# EAGLE board PGTN_daisy1_controls2 (EAGLE 9.6.0)
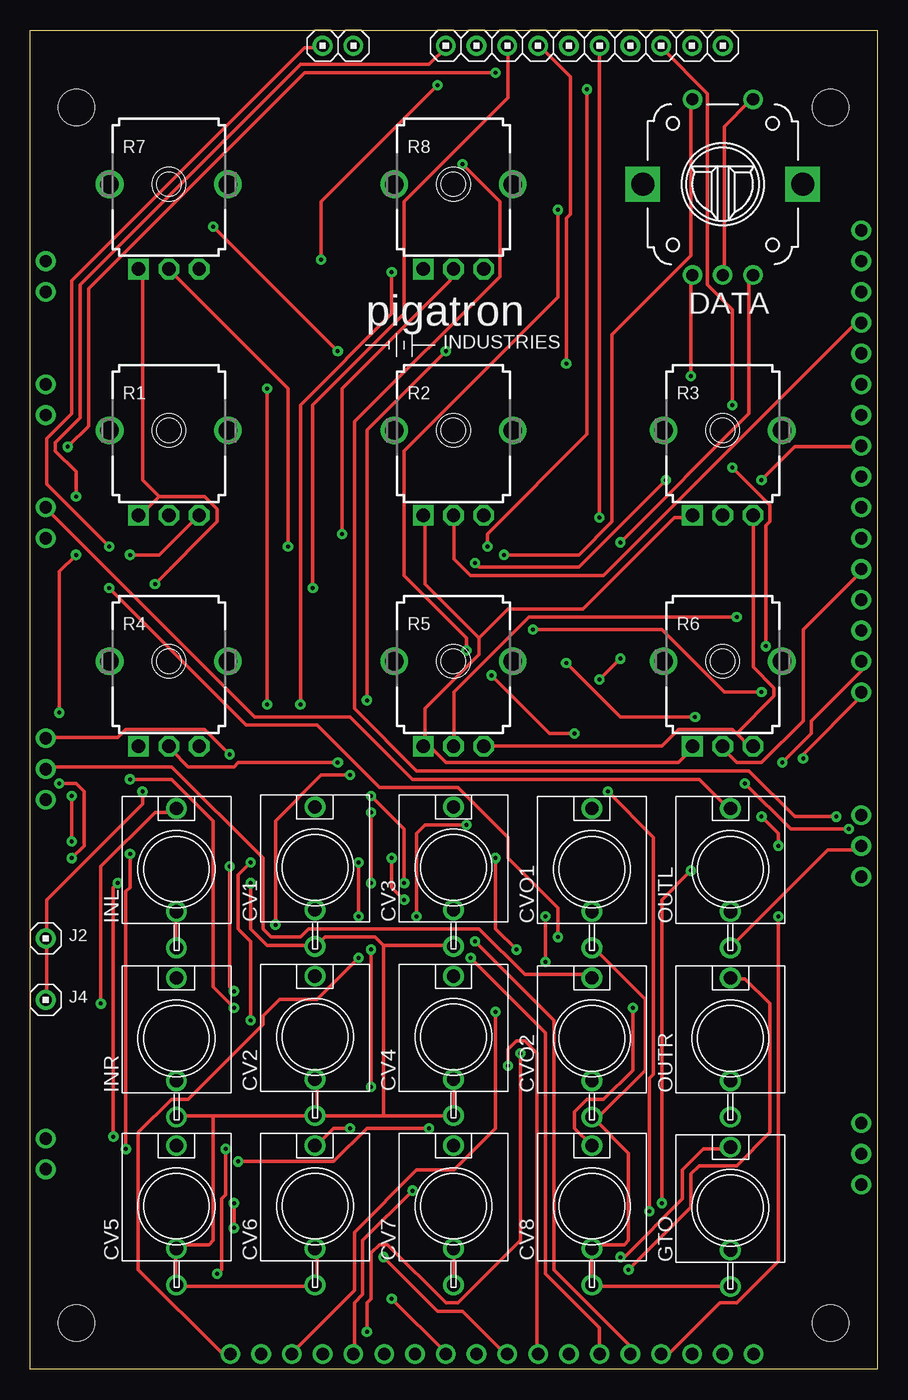
[diagram p0: board, top side]
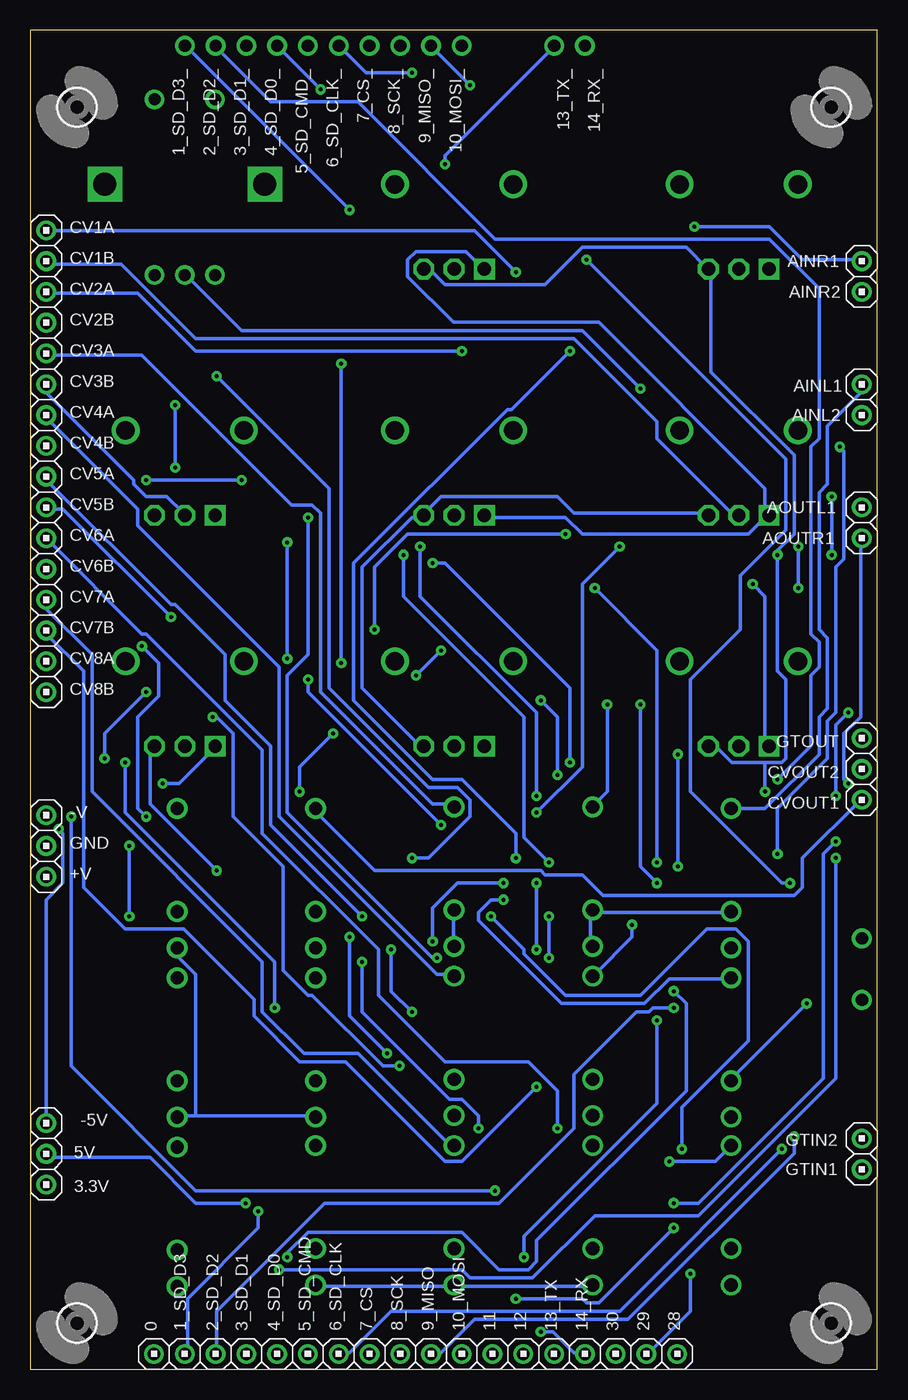
[diagram p1: board, bottom side, seen from below]

Size 69.9 x 110.48 mm. Coordinates in mm from the lower left corner, seen from the top.
Outline: 0,110.48 69.9,110.48 69.9,0 0,0 0,110.48
Copper layers (1*16): Top 0.0356mm / dielectric 1.5011mm / Bottom 0.0356mm
Design rules "pigatron": minimum track width 12mil, minimum drill 13mil, track to track 15mil, track to pad 10mil, pad to pad 10mil, via to via 10mil, smd to smd 6mil, copper to edge 15mil, drill to drill 10mil, minimum pad ring 12mil, minimum via ring 10mil, stop-mask expansion 4mil, vias tented up to drill 0mil, thermal gap 10mil

## Footprints (pad centres in the part's own frame; a part is rotated, then mirrored left to right if it is on the bottom)
HEADER/MALE/01 = drill 1.016: 1 0,0
WQP-PJ301M-12_JACK = drill 1.1: P$1 0,5; P$2 0,-3.5; P$3 0,-6.5
PEC12_INCREMENTAL_ENCODER = drill 1: A -2.5,-7.5; B 2.5,-7.5; C 0,-7.5; P1 -2.5,7; P2 2.5,7 | drill 1.9 square: GND@1 -6.6,0; GND@2 6.6,0
9MM_SNAP-IN_POT = drill 1.1 square: 1 -2.5,-7 | drill 1.1 octagon: 2 0,-7; 3 2.5,-7 | drill 1.524 pad 2.286: CHASSIS1 -4.881,0; CHASSIS2 4.881,0
STANDOFF/3.0 = hole 3: 0,0

## Placement (x,y rotation side)
0  HEADER/MALE/01  [HEADER/MALE/01]  59.69,1.26 90 bottom
1_SD_D3  HEADER/MALE/01  [HEADER/MALE/01]  57.15,1.26 90 bottom
1_SD_D3_  HEADER/MALE/01  [HEADER/MALE/01]  57.15,109.21 270 top
2_SD_D2  HEADER/MALE/01  [HEADER/MALE/01]  54.61,1.26 90 bottom
2_SD_D2_  HEADER/MALE/01  [HEADER/MALE/01]  54.61,109.21 270 top
3.3V  HEADER/MALE/01  [HEADER/MALE/01]  68.58,15.23 270 bottom
3_SD_D1  HEADER/MALE/01  [HEADER/MALE/01]  52.07,1.26 90 bottom
3_SD_D1_  HEADER/MALE/01  [HEADER/MALE/01]  52.07,109.21 270 top
4_SD_D0  HEADER/MALE/01  [HEADER/MALE/01]  49.53,1.26 90 bottom
4_SD_D0_  HEADER/MALE/01  [HEADER/MALE/01]  49.53,109.21 270 top
5_SD_CMD  HEADER/MALE/01  [HEADER/MALE/01]  46.99,1.26 90 bottom
5_SD_CMD_  HEADER/MALE/01  [HEADER/MALE/01]  46.99,109.21 270 top
5V  HEADER/MALE/01  [HEADER/MALE/01]  68.58,17.77 180 bottom
6_SD_CLK  HEADER/MALE/01  [HEADER/MALE/01]  44.45,1.26 90 bottom
6_SD_CLK_  HEADER/MALE/01  [HEADER/MALE/01]  44.45,109.21 270 top
7_CS  HEADER/MALE/01  [HEADER/MALE/01]  41.91,1.26 90 bottom
7_CS_  HEADER/MALE/01  [HEADER/MALE/01]  41.91,109.21 270 top
8_SCK  HEADER/MALE/01  [HEADER/MALE/01]  39.37,1.26 90 bottom
8_SCK_  HEADER/MALE/01  [HEADER/MALE/01]  39.37,109.21 270 top
9_MISO  HEADER/MALE/01  [HEADER/MALE/01]  36.83,1.26 90 bottom
9_MISO_  HEADER/MALE/01  [HEADER/MALE/01]  36.83,109.21 270 top
10_MOSI  HEADER/MALE/01  [HEADER/MALE/01]  34.29,1.26 90 bottom
10_MOSI_  HEADER/MALE/01  [HEADER/MALE/01]  34.29,109.21 270 top
11  HEADER/MALE/01  [HEADER/MALE/01]  31.75,1.26 90 bottom
12  HEADER/MALE/01  [HEADER/MALE/01]  29.21,1.26 90 bottom
13_TX  HEADER/MALE/01  [HEADER/MALE/01]  26.67,1.26 90 bottom
13_TX_  HEADER/MALE/01  [HEADER/MALE/01]  26.67,109.21 270 top
14_RX  HEADER/MALE/01  [HEADER/MALE/01]  24.13,1.26 90 bottom
14_RX_  HEADER/MALE/01  [HEADER/MALE/01]  24.13,109.21 270 top
28  HEADER/MALE/01  [HEADER/MALE/01]  16.51,1.26 90 bottom
29  HEADER/MALE/01  [HEADER/MALE/01]  19.05,1.26 90 bottom
30  HEADER/MALE/01  [HEADER/MALE/01]  21.59,1.26 90 bottom
+V  HEADER/MALE/01  [HEADER/MALE/01]  68.58,40.63 0 bottom
-5V  HEADER/MALE/01  [HEADER/MALE/01]  68.58,20.31 0 bottom
-V  HEADER/MALE/01  [HEADER/MALE/01]  68.58,45.71 0 bottom
AINL1  HEADER/MALE/01  [HEADER/MALE/01]  1.27,81.27 180 bottom
AINL2  HEADER/MALE/01  [HEADER/MALE/01]  1.27,78.73 180 bottom
AINR1  HEADER/MALE/01  [HEADER/MALE/01]  1.27,91.43 180 bottom
AINR2  HEADER/MALE/01  [HEADER/MALE/01]  1.27,88.89 180 bottom
AOUTL1  HEADER/MALE/01  [HEADER/MALE/01]  1.27,71.11 180 bottom
AOUTR1  HEADER/MALE/01  [HEADER/MALE/01]  1.27,68.57 180 bottom
CV1  WQP-PJ301M-12_JACK  [WQP-PJ301M-12_JACK]  23.5,41.39 0 top
CV1A  HEADER/MALE/01  [HEADER/MALE/01]  68.58,93.97 0 bottom
CV1B  HEADER/MALE/01  [HEADER/MALE/01]  68.58,91.43 0 bottom
CV2  WQP-PJ301M-12_JACK  [WQP-PJ301M-12_JACK]  23.5,27.42 0 top
CV2A  HEADER/MALE/01  [HEADER/MALE/01]  68.58,88.89 0 bottom
CV2B  HEADER/MALE/01  [HEADER/MALE/01]  68.58,86.35 0 bottom
CV3  WQP-PJ301M-12_JACK  [WQP-PJ301M-12_JACK]  34.92,41.39 0 top
CV3A  HEADER/MALE/01  [HEADER/MALE/01]  68.58,83.81 0 bottom
CV3B  HEADER/MALE/01  [HEADER/MALE/01]  68.58,81.27 0 bottom
CV4  WQP-PJ301M-12_JACK  [WQP-PJ301M-12_JACK]  34.92,27.42 0 top
CV4A  HEADER/MALE/01  [HEADER/MALE/01]  68.58,78.73 0 bottom
CV4B  HEADER/MALE/01  [HEADER/MALE/01]  68.58,76.19 0 bottom
CV5  WQP-PJ301M-12_JACK  [WQP-PJ301M-12_JACK]  12.06,13.45 0 top
CV5A  HEADER/MALE/01  [HEADER/MALE/01]  68.58,73.65 0 bottom
CV5B  HEADER/MALE/01  [HEADER/MALE/01]  68.58,71.11 0 bottom
CV6  WQP-PJ301M-12_JACK  [WQP-PJ301M-12_JACK]  23.5,13.45 0 top
CV6A  HEADER/MALE/01  [HEADER/MALE/01]  68.58,68.57 0 bottom
CV6B  HEADER/MALE/01  [HEADER/MALE/01]  68.58,66.03 0 bottom
CV7  WQP-PJ301M-12_JACK  [WQP-PJ301M-12_JACK]  34.92,13.45 0 top
CV7A  HEADER/MALE/01  [HEADER/MALE/01]  68.58,63.49 0 bottom
CV7B  HEADER/MALE/01  [HEADER/MALE/01]  68.58,60.95 0 bottom
CV8  WQP-PJ301M-12_JACK  [WQP-PJ301M-12_JACK]  46.35,13.45 0 top
CV8A  HEADER/MALE/01  [HEADER/MALE/01]  68.58,58.41 0 bottom
CV8B  HEADER/MALE/01  [HEADER/MALE/01]  68.58,55.87 0 bottom
CVO1  WQP-PJ301M-12_JACK  [WQP-PJ301M-12_JACK]  46.35,41.27 0 top
CVO2  WQP-PJ301M-12_JACK  [WQP-PJ301M-12_JACK]  46.35,27.29 0 top
CVOUT1  HEADER/MALE/01  [HEADER/MALE/01]  1.27,46.98 180 bottom
CVOUT2  HEADER/MALE/01  [HEADER/MALE/01]  1.27,49.52 180 bottom
DATA  ENCODER_SW1-PEC12  [PEC12_INCREMENTAL_ENCODER]  57.15,97.78 0 top
GND  HEADER/MALE/01  [HEADER/MALE/01]  68.58,43.17 0 bottom
GTIN1  HEADER/MALE/01  [HEADER/MALE/01]  1.27,16.5 180 bottom
GTIN2  HEADER/MALE/01  [HEADER/MALE/01]  1.27,19.04 180 bottom
GTO  WQP-PJ301M-12_JACK  [WQP-PJ301M-12_JACK]  57.78,13.33 0 top
GTOUT  HEADER/MALE/01  [HEADER/MALE/01]  1.27,52.06 180 bottom
INL  WQP-PJ301M-12_JACK  [WQP-PJ301M-12_JACK]  12.06,41.27 0 top
INR  WQP-PJ301M-12_JACK  [WQP-PJ301M-12_JACK]  12.06,27.29 0 top
J2  HEADER/MALE/01  [HEADER/MALE/01]  1.27,35.55 0 top
J4  HEADER/MALE/01  [HEADER/MALE/01]  1.27,30.47 0 top
OUTL  WQP-PJ301M-12_JACK  [WQP-PJ301M-12_JACK]  57.78,41.27 0 top
OUTR  WQP-PJ301M-12_JACK  [WQP-PJ301M-12_JACK]  57.78,27.29 0 top
R1  [9MM_SNAP-IN_POT]  11.43,77.46 0 top
R2  [9MM_SNAP-IN_POT]  34.92,77.46 0 top
R3  [9MM_SNAP-IN_POT]  57.15,77.46 0 top
R4  [9MM_SNAP-IN_POT]  11.43,58.41 0 top
R5  [9MM_SNAP-IN_POT]  34.92,58.41 0 top
R6  [9MM_SNAP-IN_POT]  57.15,58.41 0 top
R7  [9MM_SNAP-IN_POT]  11.43,97.78 0 top
R8  [9MM_SNAP-IN_POT]  34.92,97.78 0 top
U$1  [PIGATRON-LOGO]  36.58,86.1 0 top
U$2  [STANDOFF/3.0]  3.81,3.8 180 bottom
U$3  [STANDOFF/3.0]  66.04,3.8 180 bottom
U$4  [STANDOFF/3.0]  66.04,104.13 0 bottom
U$7  [STANDOFF/3.0]  3.81,104.13 0 bottom

## Library data of the parts
0 1_SD_D3 1_SD_D3_ 2_SD_D2 2_SD_D2_ 3.3V 3_SD_D1 3_SD_D1_ 4_SD_D0 4_SD_D0_ 5_SD_CMD 5_SD_CMD_ 5V 6_SD_CLK 6_SD_CLK_ 7_CS 7_CS_ 8_SCK 8_SCK_ 9_MISO 9_MISO_ 10_MOSI 10_MOSI_ 11 12 13_TX 13_TX_ 14_RX 14_RX_ 28-30 +V -5V -V AINL1 AINL2 AINR1 AINR2 AOUTL1 AOUTR1 CV1A CV1B CV2A CV2B CV3A CV3B CV4A CV4B CV5A CV5B CV6A CV6B CV7A CV7B CV8A CV8B CVOUT1 CVOUT2 GND GTIN1 GTIN2 GTOUT J2 J4 = connectors; SPICEPREFIX: X
CV1-CV8 CVO1 CVO2 DATA GTO INL INR OUTL OUTR R1-R8 = controls
U$1-U$4 U$7 = mechanical

## Nets
+12V: +V.1
-12V: -V.1
N$1: AOUTR1.1 OUTR.P$1
N$2: AINR1.1 INR.P$1
N$3: CV1.P$1 CV1A.1
N$4: AINL1.1 INL.P$1 INR.P$2
N$5: CV1B.1 R1.2
N$6: CV2.P$1 CV2A.1
N$7: CV3.P$1 CV3A.1
N$8: CV4.P$1 CV4A.1
N$9: CV5.P$1 CV5A.1
N$10: CV6.P$1 CV6A.1
N$11: CV7.P$1 CV7A.1
N$12: CV8.P$1 CV8A.1
N$13: CVO1.P$1 CVOUT1.1
N$14: CVO2.P$1 CVOUT2.1
N$15: CV3B.1 R3.2
N$16: CV4B.1 R4.2
N$17: CV5B.1 R5.2
N$18: CV6B.1 R6.2
N$19: CV7B.1 R7.2
N$20: CV8B.1 R8.2
N$21: GTO.P$1 GTOUT.1
N$22: CV2B.1 R2.2
N$23: -5V.1 R1.1 R2.1 R3.1 R4.1 R5.1 R6.1 R7.1 R8.1
N$25: 30.1 DATA.A
N$26: 29.1 DATA.B
N$27: 28.1 DATA.P1
N$28: 7_CS.1 7_CS_.1
N$29: 8_SCK.1 8_SCK_.1
N$30: 9_MISO.1 9_MISO_.1
N$31: 10_MOSI.1 10_MOSI_.1
N$34: 6_SD_CLK.1 6_SD_CLK_.1
N$35: 5_SD_CMD.1 5_SD_CMD_.1
N$36: 4_SD_D0.1 4_SD_D0_.1
N$37: 3_SD_D1.1 3_SD_D1_.1
N$38: 2_SD_D2.1 2_SD_D2_.1
N$39: 1_SD_D3.1 1_SD_D3_.1
N$40: 13_TX.1 13_TX_.1
N$41: 14_RX.1 14_RX_.1
N$42: AOUTL1.1 OUTL.P$1
N$44: 5V.1 J2.1 J4.1 R1.3 R2.3 R3.3 R4.3 R5.3 R6.3 R7.3 R8.3
PE: CV1.P$2 CV1.P$3 CV2.P$2 CV2.P$3 CV3.P$2 CV3.P$3 CV4.P$2 CV4.P$3 CV5.P$2 CV5.P$3 CV6.P$2 CV6.P$3 CV7.P$2 CV7.P$3 CV8.P$2 CV8.P$3 CVO1.P$3 CVO2.P$3 DATA.C DATA.P2 GND.1 GTO.P$3 INL.P$2 INL.P$3 INR.P$3 OUTL.P$3 OUTR.P$3

## Tracks (layer width: path | path; a pad name or v marks a point on that pad's centre or on a via)
N$1  (via drill 0.33)
  Top 0.305: v2.4,48.34 3.77,48.34 4.46,47.65 4.46,43.2 v3.43,42.17 | v49.38,8.22 54.52,13.36 54.52,16.11 55.21,16.79 58.29,16.79 61.04,19.54 61.04,30.16 58.98,32.22 57.95,32.22 OUTR.P$1
  Bottom 0.305: v2.4,48.34 2.74,48.68 2.74,52.45 1.37,53.83 1.37,68.57 AOUTR1.1 | v3.43,42.17 3.43,23.99 14.74,12.68 23.32,12.68 28.46,7.53 33.6,7.53 34.29,8.22 v49.38,8.22
N$2  (via drill 0.33)
  Top 0.305: v25.38,84 v15.09,94.29 | v29.83,42.17 29.83,39.77 v30.86,38.74
  Bottom 0.305: v15.09,94.29 8.91,94.29 6.17,91.54 1.37,91.54 AINR1.1 | v25.38,84 30.18,79.2 30.52,79.2 43.2,66.51 43.2,55.2 36.69,48.68 34.29,48.68 29.83,44.22 v29.83,42.17 | v30.86,38.74 31.89,38.74 32.92,37.71 32.92,37.02 26.06,30.16 19.2,30.16 17.14,32.22 12.34,32.22 INR.P$1
N$3  (via drill 0.33)
  Top 0.305: v29.83,90.52 29.83,87.09 22.29,79.54 v22.29,54.85
  Bottom 0.305: v29.83,90.52 33.26,93.94 68.58,93.94 CV1A.1 | v22.29,54.85 22.29,47.65 23.32,46.62 CV1.P$1
N$4  (via drill 0.33)
  Top 0.305: v5.83,30.16 5.83,41.48 10.29,45.94 12,45.94 INL.P$1
  Bottom 0.305: AINL1.1 1.37,81.26 1.37,80.57 4.12,77.83 4.12,73.03 4.8,72.34 4.8,61.03 4.12,60.34 4.12,54.51 4.8,53.83 4.8,50.74 9.26,46.28 12,46.28 INL.P$1 | v5.83,30.16 12,23.99 INR.P$2
N$5
  Bottom 0.305: CV1B.1 68.58,91.2 62.41,91.2 56.24,85.03 25.03,85.03 18.17,78.17 18.17,76.8 11.66,70.28 R1.2
N$6  (via drill 0.33)
  Top 0.305: v34.29,84 27.77,77.48 v27.77,55.2 | v26.4,49.02 24,49.02 20.23,45.25 v20.23,36.68
  Bottom 0.305: v34.29,84 56.24,84 61.04,88.8 68.58,88.8 CV2A.1 | v27.77,55.2 26.4,53.83 v26.4,49.02 | v20.23,36.68 20.23,35.65 23.32,32.57 CV2.P$1
N$7
  Bottom 0.305: CV3A.1 68.58,83.66 60.69,83.66 48.35,71.31 46.63,71.31 45.95,70.63 45.95,55.88 36.69,46.62 34.98,46.62 CV3.P$1
N$8
  Bottom 0.305: CV4A.1 68.58,78.51 61.04,70.97 61.04,69.6 49.38,57.94 49.38,45.6 36.35,32.57 34.98,32.57 CV4.P$1
N$9  (via drill 0.33)
  Top 0.305: v42.52,33.59 v42.52,37.37 | v32.92,19.88 27.77,19.88 25.03,17.13 v17.14,17.13
  Bottom 0.305: v42.52,37.37 50.06,44.91 50.06,51.43 53.84,55.2 53.84,58.97 57.95,63.08 58.29,63.08 68.58,73.37 CV5A.1 | v42.52,33.59 42.52,29.48 35.32,22.28 34.29,22.28 32.92,20.91 v32.92,19.88 | v17.14,17.13 13.37,17.13 12.34,18.16 CV5.P$1
N$10  (via drill 0.33)
  Top 0.305: v26.4,19.88 25.03,19.88 23.66,18.51 CV6.P$1
  Bottom 0.305: CV6A.1 60.69,60.68 60.35,60.68 50.75,51.08 50.75,44.22 41.15,34.62 41.15,30.85 35.66,25.36 28.8,25.36 26.4,22.96 v26.4,19.88
N$11
  Bottom 0.305: CV7A.1 68.58,62.74 64.81,58.97 64.81,47.65 50.75,33.59 50.75,29.48 47.32,26.05 42.86,26.05 34.98,18.16 CV7.P$1
N$12  (via drill 0.33)
  Top 0.305: CV8A.1 68.58,57.6 64.47,53.48 64.47,52.45 v62.06,50.05 | v49.72,29.82 49.72,24.68 47.32,22.28 45.95,22.28 44.92,21.25 44.92,19.88 46.29,18.51 CV8.P$1
  Bottom 0.305: v62.06,50.05 62.06,45.94 49.72,33.59 v49.72,29.82
N$13
  Bottom 0.305: CVOUT1.1 1.37,46.97 6.17,42.17 6.17,39.77 6.86,39.08 22.63,39.08 24.35,40.8 27.43,40.8 27.77,41.14 41.49,41.14 46.29,45.94 CVO1.P$1
N$14
  Top 0.305: CVOUT2.1 1.37,49.71 11.66,49.71 19.2,42.17 19.2,36.34 19.89,35.65 22.29,35.65 22.97,36.34 37.03,36.34 40.8,32.57 46.29,32.57 CVO2.P$1
N$15
  Bottom 0.305: CV3B.1 68.58,80.57 61.38,73.37 61.38,73.03 60.35,72 58.64,72 57.26,70.63 R3.2
N$16  (via drill 0.33)
  Top 0.305: v60.35,73.37 63.09,76.11 68.58,76.11 CV4B.1 | v52.46,73.37 45.26,66.17 37.03,66.17 v36.69,66.51 | v25.38,50.05 17.14,50.05 16.8,49.71 13.03,49.71 11.66,51.08 R4.2
  Bottom 0.305: v52.46,73.37 v60.35,73.37 | v36.69,66.51 35.66,66.51 25.38,56.23 v25.38,50.05
N$17  (via drill 0.33)
  Top 0.305: v58.29,62.05 41.15,62.05 34.98,55.88 34.98,51.43 R5.2
  Bottom 0.305: v58.29,62.05 67.21,70.97 68.58,70.97 CV5B.1
N$18
  Top 0.305: CV6B.1 68.58,65.83 63.78,61.03 63.78,53.48 60.35,50.05 58.29,50.05 57.26,51.08 R6.2
N$19  (via drill 0.33)
  Top 0.305: v28.12,34.62 v28.12,23.31 | v28.12,45.94 v28.12,40.11 | v21.26,67.88 21.26,80.91 11.66,90.52 R7.2
  Bottom 0.305: v28.12,23.31 34.29,17.13 35.66,17.13 43.89,25.36 47.66,25.36 51.44,29.14 51.44,30.51 57.26,36.34 62.06,36.34 65.49,39.77 65.49,57.6 68.58,60.68 CV7B.1 | v28.12,40.11 v28.12,34.62 | v28.12,45.94 24.35,49.71 24.35,64.8 v21.26,67.88
N$20  (via drill 0.33)
  Top 0.305: v63.78,50.4 63.78,50.74 68.58,55.54 CV8B.1 | v60.35,55.88 57.26,55.88 52.12,61.03 v41.49,61.03 | v25.72,68.91 25.72,80.91 34.63,89.83 34.63,90.52 R8.2
  Bottom 0.305: v63.78,50.4 63.78,52.45 v60.35,55.88 | v41.49,61.03 41.49,66.17 38.75,68.91 v25.72,68.91
N$21  (via drill 0.33)
  Top 0.305: v16.46,50.74 14.4,52.8 7.89,52.8 7.2,52.11 1.37,52.11 GTOUT.1 | v16.46,41.48 16.46,31.54 v16.8,31.19 | v48.69,9.25 49.03,9.25 53.84,14.05 53.84,16.45 55.55,18.16 57.61,18.16 GTO.P$1
  Bottom 0.305: v16.46,41.48 v16.46,50.74 | v16.8,31.19 15.77,30.16 15.77,22.96 28.12,10.62 28.12,8.9 28.8,8.22 31.2,8.22 34.29,11.31 46.98,11.31 48.69,9.59 v48.69,9.25
N$22
  Top 0.305: CV2B.1 68.58,86.06 67.89,86.06 47.32,65.48 36.35,65.48 34.98,66.85 34.98,70.28 R2.2
N$23  (via drill 0.33)
  Top 0.305: v10.29,64.8 15.43,69.94 15.43,70.97 14.4,72 10.63,72 | 10.63,72 9.26,70.63 R1.1 | 10.63,72 9.26,73.37 9.26,90.52 R7.1 | v67.55,44.57 62.75,44.57 v58.98,48.34 | R6.1 54.52,51.08 53.49,50.05 34.29,50.05 33.26,51.08 32.58,51.08 R5.1 32.58,51.43 32.58,54.51 37.03,58.97 37.03,60.34 | 37.03,60.34 32.58,64.8 32.58,70.28 R2.1 | 37.03,60.34 39.43,62.74 45.61,62.74 53.15,70.28 54.52,70.28 R3.1
  Bottom 0.305: v10.29,64.8 9.26,63.77 9.26,51.43 R4.1 | R8.1 32.58,90.86 33.95,92.23 38.06,92.23 38.75,91.54 38.75,90.17 34.98,86.4 22.97,86.4 9.26,72.68 9.26,70.63 R1.1 9.26,70.28 10.63,68.91 24.35,68.91 25.72,70.28 32.23,70.28 R2.1 | -5V.1 68.58,38.74 67.21,40.11 67.21,44.22 v67.55,44.57 | v58.98,48.34 57.61,48.34 54.86,51.08 R6.1
N$25  (via drill 0.33)
  Top 0.305: v54.52,81.94 54.52,90.17 DATA.A | v38.41,42.17 38.41,36.34 v40.12,34.62 | v38.41,29.48 38.41,19.88 34.98,16.45 31.89,16.45 26.75,11.31 26.75,6.5 21.6,1.36 30.1
  Bottom 0.305: v54.52,81.94 45.26,72.68 45.26,56.23 37.03,48 34.63,48 33.6,46.97 33.6,45.6 37.03,42.17 v38.41,42.17 | v40.12,34.62 40.12,31.19 v38.41,29.48
N$26  (via drill 0.33)
  Top 0.305: v48.69,68.23 59.32,78.86 59.32,90.17 DATA.B | v46.98,56.91 v48.69,58.63 | v36.01,44.91 32.58,44.91 31.89,44.22 v31.89,37.37 | v16.12,18.16 16.12,14.39 15.77,14.05 15.77,8.22 v15.43,7.88
  Bottom 0.305: v48.69,58.63 v48.69,68.23 | v46.98,56.91 46.98,55.88 v36.01,44.91 | v31.89,37.37 29.15,34.62 29.15,34.28 25.72,30.85 19.55,30.85 14.06,36.34 11.66,36.34 10.63,35.31 10.63,27.08 16.12,21.59 v16.12,18.16 | v15.43,7.88 15.43,4.79 18.86,1.36 29.1
N$27  (via drill 0.33)
  Top 0.305: v39.09,67.2 45.26,67.2 48.01,69.94 48.01,85.37 54.52,91.89 54.52,104.57 DATA.P1 | v27.09,37.37 v27.09,41.82 | v27.09,33.94 23.66,30.51 20.57,30.51 19.2,29.14 19.2,28.45 13.03,22.28 11.66,22.28 8.91,19.54 8.91,8.22 15.77,1.36 16.46,1.36 28.1
  Bottom 0.305: v39.09,67.2 39.09,63.77 29.15,53.83 29.15,43.88 v27.09,41.82 | v27.09,33.94 v27.09,37.37
N$28  (via drill 0.33)
  Top 0.305: v39.43,25.02 39.43,26.39 40.12,27.08 40.8,27.08 41.83,26.05 41.83,1.36 7_CS.1 | v54.86,53.83 48.69,53.83 v44.23,58.28 | v44.23,82.97 44.23,94.97 44.58,95.32 44.58,106.63 42.18,109.03 7_CS_.1
  Bottom 0.305: v39.43,25.02 40.8,25.02 46.63,30.85 46.98,30.85 49.03,32.91 49.03,41.48 53.15,45.6 53.15,52.45 54.52,53.83 v54.86,53.83 | v44.23,82.97 v44.23,58.28
N$29  (via drill 0.33)
  Top 0.305: v29.15,9.25 33.6,4.79 35.66,4.79 39.09,1.36 8_SCK.1 | v18.17,28.79 18.17,35.31 17.14,36.34 17.14,40.8 v18.17,41.82 | v23.32,64.45 23.32,79.54 30.86,87.09 30.86,96.34 39.43,104.92 39.43,109.03 8_SCK_.1
  Bottom 0.305: v29.15,9.25 29.15,10.96 18.17,21.94 v18.17,28.79 | v18.17,41.82 18.17,59.31 v23.32,64.45
N$30  (via drill 0.33)
  Top 0.305: v6.86,19.19 6.86,39.77 v7.2,40.11 | v24,91.54 24,96.34 v33.6,105.95
  Bottom 0.305: v6.86,19.19 6.86,17.82 20.57,4.11 33.26,4.11 36.01,1.36 36.69,1.36 9_MISO.1 | v7.2,40.11 7.89,40.11 15.43,47.65 15.43,56.91 11.32,61.03 11.32,65.48 7.54,69.26 7.54,75.08 v24,91.54 | v33.6,105.95 36.69,109.03 9_MISO_.1
N$31  (via drill 0.33)
  Top 0.305: v29.83,5.82 34.29,1.36 10_MOSI.1 | v16.8,13.71 v16.8,11.65 | v3.43,47.31 v3.43,43.54 | v2.4,54.17 2.4,65.83 v3.77,67.2 | v3.77,72 3.77,74.06 2.06,75.77 2.06,76.46 4.12,78.51 4.12,89.49 22.29,107.66 32.92,107.66 34.29,109.03 10_MOSI_.1
  Bottom 0.305: v29.83,5.82 24.35,5.82 24,5.48 22.97,5.48 v16.8,11.65 | v16.8,13.71 14.74,13.71 4.46,23.99 4.46,42.51 v3.43,43.54 | v3.43,47.31 3.43,53.14 v2.4,54.17 | v3.77,72 v3.77,67.2
N$34  (via drill 0.33)
  Top 0.305: v7.89,18.16 7.89,39.42 8.23,39.77 v8.23,42.51 | v3.09,76.11 4.8,77.83 4.8,89.14 22.63,106.97 v38.41,106.97
  Bottom 0.305: v7.89,18.16 21.26,4.79 40.12,4.79 43.55,1.36 44.23,1.36 6_SD_CLK.1 | v8.23,42.51 8.23,46.28 4.12,50.4 4.12,53.48 3.43,54.17 3.43,66.17 2.74,66.85 2.74,75.77 v3.09,76.11 | v38.41,106.97 42.18,106.97 44.23,109.03 6_SD_CLK_.1
N$35  (via drill 0.33)
  Top 0.305: v36.35,33.94 42.52,27.76 42.52,7.88 46.98,3.42 46.98,1.36 5_SD_CMD.1 | v46.98,70.28 46.98,109.03 5_SD_CMD_.1
  Bottom 0.305: v36.35,33.94 36.69,33.94 48.69,45.94 48.69,57.25 46.98,58.97 v46.98,70.28
N$36  (via drill 0.33)
  Top 0.305: v36.69,35.31 43.2,28.79 43.2,8.22 49.38,2.05 49.38,1.36 4_SD_D0.1 | v30.86,40.11 30.86,44.57 v28.12,47.31 | v37.72,67.88 37.72,68.91 45.95,77.14 v45.95,105.6
  Bottom 0.305: v36.69,35.31 36.69,38.05 34.63,40.11 v30.86,40.11 | v28.12,47.31 28.12,54.17 37.72,63.77 v37.72,67.88 | v45.95,105.6 49.38,109.03 4_SD_D0_.1
N$37  (via drill 0.33)
  Top 0.305: v61.72,37.37 61.72,8.9 58.29,5.48 56.92,5.48 52.81,1.36 52.12,1.36 3_SD_D1.1 | v61.72,43.2 61.72,44.22 v60.35,45.6 | v60.69,59.66 60.69,69.6 61.04,69.94 61.04,71.31 v57.95,74.4 | v57.95,79.54 57.95,87.43 55.89,89.49 55.89,105.26 52.12,109.03 3_SD_D1_.1
  Bottom 0.305: v61.72,43.2 v61.72,37.37 | v60.35,45.6 61.04,46.28 61.04,53.83 59.32,55.54 59.32,58.28 v60.69,59.66 | v57.95,79.54 v57.95,74.4
N$38  (via drill 0.33)
  Top 0.305: v16.8,29.82 15.09,31.54 15.09,45.25 11.66,48.68 v8.23,48.68
  Bottom 0.305: v16.8,29.82 18.52,29.82 18.86,29.48 19.89,29.48 25.03,24.34 25.03,19.88 31.2,13.71 45.61,13.71 54.52,4.79 54.52,1.36 2_SD_D2.1 | v8.23,48.68 5.49,51.43 5.49,57.25 4.8,57.94 4.8,60 5.49,60.68 5.49,76.11 4.8,76.8 4.8,89.14 8.91,93.26 31.55,93.26 42.86,104.57 50.06,104.57 54.52,109.03 2_SD_D2_.1
N$39  (via drill 0.33)
  Top 0.305: v51.09,13.02 51.09,23.99 51.44,24.34 51.44,43.88 v47.66,47.65 | v44.92,52.45 42.86,52.45 v38.06,57.25 | v36.01,59.31 36.01,60.34 30.86,65.48 30.86,75.77 43.55,88.46 v43.55,95.66
  Bottom 0.305: v51.09,13.02 51.09,11.65 56.92,5.82 56.92,1.36 1_SD_D3.1 | v47.66,47.65 47.66,49.71 v44.92,52.45 | v36.01,59.31 v38.06,57.25 | v43.55,95.66 56.92,109.03 1_SD_D3_.1
N$40  (via drill 0.33)
  Top 0.305: v31.55,14.73 27.43,10.62 27.43,6.16 26.75,5.48 26.75,1.36 13_TX.1 | v66.52,45.6 63.09,45.6 59.32,49.37 31.89,49.37 26.75,54.51 26.75,78.17 38.75,90.17 38.75,96.34 v35.66,99.43
  Bottom 0.305: v31.55,14.73 56.24,14.73 66.52,25.02 v66.52,45.6 | v35.66,99.43 35.66,100.12 26.75,109.03 13_TX_.1
N$41  (via drill 0.33)
  Top 0.305: v27.77,3.08 27.77,5.48 28.12,5.82 28.12,9.59 28.8,10.28 29.49,10.28 34.29,5.48 35.32,5.48 40.46,10.62 v40.46,26.05 | v43.55,35.65 43.55,38.05 39.43,42.17 39.43,43.88 35.32,48 28.8,48 23.66,53.14 17.83,53.14 v6.51,64.45 | v6.51,67.88 1.37,73.03 1.37,76.8 3.43,78.86 3.43,89.83 22.63,109.03 24,109.03 14_RX_.1
  Bottom 0.305: v27.77,3.08 26.75,3.08 25.03,1.36 24.35,1.36 14_RX.1 | v40.46,26.05 43.55,29.14 v43.55,35.65 | v6.51,67.88 v6.51,64.45
N$42
  Top 0.305: AOUTL1.1 1.37,70.97 18.52,53.83 26.4,53.83 31.55,48.68 55.21,48.68 57.61,46.28 OUTL.P$1
N$44  (via drill 0.33)
  Top 0.305: J4.1 1.37,30.51 1.37,35.31 J2.1 1.37,35.65 1.37,38.74 9.26,46.62 v9.26,47.65 | v52.12,13.71 52.12,38.74 v54.52,41.14 | 58.29,52.45 59.32,51.43 R6.3 | 58.29,52.45 57.95,52.8 53.49,52.8 52.12,51.43 37.72,51.43 R5.3 | 58.29,52.45 61.38,55.54 61.38,56.23 59.66,57.94 59.66,70.28 R3.3 | v8.23,67.2 10.63,67.2 13.72,70.28 R1.3
  Bottom 0.305: 9.26,50.05 7.89,50.05 7.54,50.4 7.54,56.91 8.23,57.6 v8.23,67.2 8.23,67.54 6.86,68.91 6.86,75.43 13.72,82.29 13.72,90.52 R7.3 14.06,90.86 15.77,92.57 24.35,92.57 27.43,89.49 35.66,89.49 36.69,90.52 37.38,90.52 R8.3 | 9.26,50.05 12,50.05 13.03,51.08 13.72,51.08 R4.3 | 9.26,50.05 v9.26,47.65 | R1.3 14.06,70.63 25.03,70.63 26.4,72 36.01,72 37.38,70.63 R2.3 37.72,70.28 38.41,70.28 42.52,66.17 42.52,56.23 37.72,51.43 R5.3 | v52.12,13.71 56.24,13.71 60.01,17.48 68.58,17.48 5V.1 | v54.52,41.14 60.01,46.62 60.01,50.74 59.66,51.08 R6.3
PE  (via drill 0.33)
  Top 0.305: GND.1 68.58,42.85 65.84,42.85 57.95,34.97 OUTL.P$3 | 46.63,20.56 50.75,24.68 50.75,30.51 46.63,34.62 CVO1.P$3 | CV4.P$2 34.98,23.65 34.98,21.25 CV4.P$3 34.63,20.91 29.15,20.91 | 15.09,20.91 23.32,20.91 CV2.P$3 | 15.09,20.91 12.34,20.91 INR.P$3 | CV2.P$2 23.66,23.65 23.66,21.25 CV2.P$3 | 29.15,20.91 23.66,20.91 CV2.P$3 | GTO.P$3 57.61,6.85 46.63,6.85 CV8.P$3 46.29,7.19 46.29,9.93 CV8.P$2 46.63,10.28 49.03,10.28 49.38,10.62 49.38,17.82 46.63,20.56 | CV7.P$3 34.98,7.19 34.98,9.93 CV7.P$2 | CV6.P$2 23.66,9.93 23.66,7.19 CV6.P$3 23.32,6.85 12.34,6.85 CV5.P$3 12,7.19 12,9.93 CV5.P$2 12.34,10.28 14.74,10.28 15.09,10.62 15.09,20.91 | 46.63,20.56 CVO2.P$3 | DATA.C 57.26,90.52 57.26,102.52 59.32,104.57 DATA.P2 | INL.P$3 12,34.97 12,37.71 INL.P$2 | 29.15,34.97 34.63,34.97 CV3.P$3 | 29.15,34.97 28.46,35.65 24.35,35.65 23.66,34.97 CV1.P$3 23.32,34.97 19.55,34.97 18.17,36.34 v18.17,40.11 | v19.55,54.85 v19.55,80.91 | 29.15,34.97 29.15,20.91
  Bottom 0.305: 56.24,20.91 57.61,20.91 OUTR.P$3 | 56.24,20.91 46.63,20.91 CVO2.P$3 | 56.24,20.91 56.24,32.57 57.61,33.94 57.61,34.62 OUTL.P$3 | CV6.P$3 23.66,6.85 34.63,6.85 CV7.P$3 34.98,6.85 46.29,6.85 CV8.P$3 | CV3.P$3 34.98,34.97 34.98,37.71 CV3.P$2 | CV1.P$3 23.66,34.97 23.66,37.71 CV1.P$2 23.32,37.71 12.34,37.71 INL.P$2 | v19.55,80.91 24.35,85.71 52.46,85.71 56.92,90.17 DATA.C | v19.55,54.85 19.55,41.48 v18.17,40.11

## Text on the board
bNames: Rob Ellis 2020